# Altium PCB Photo Board Rec.PcbDoc
Units mm, origin at the board's own origin, x right, y up, seen from the top; angles counter-clockwise.
Board outline 38.5 x 9.75 mm, 2 copper layers (Top Layer, Bottom Layer); 4 components, 2 nets, 7 pads, 0 vias.
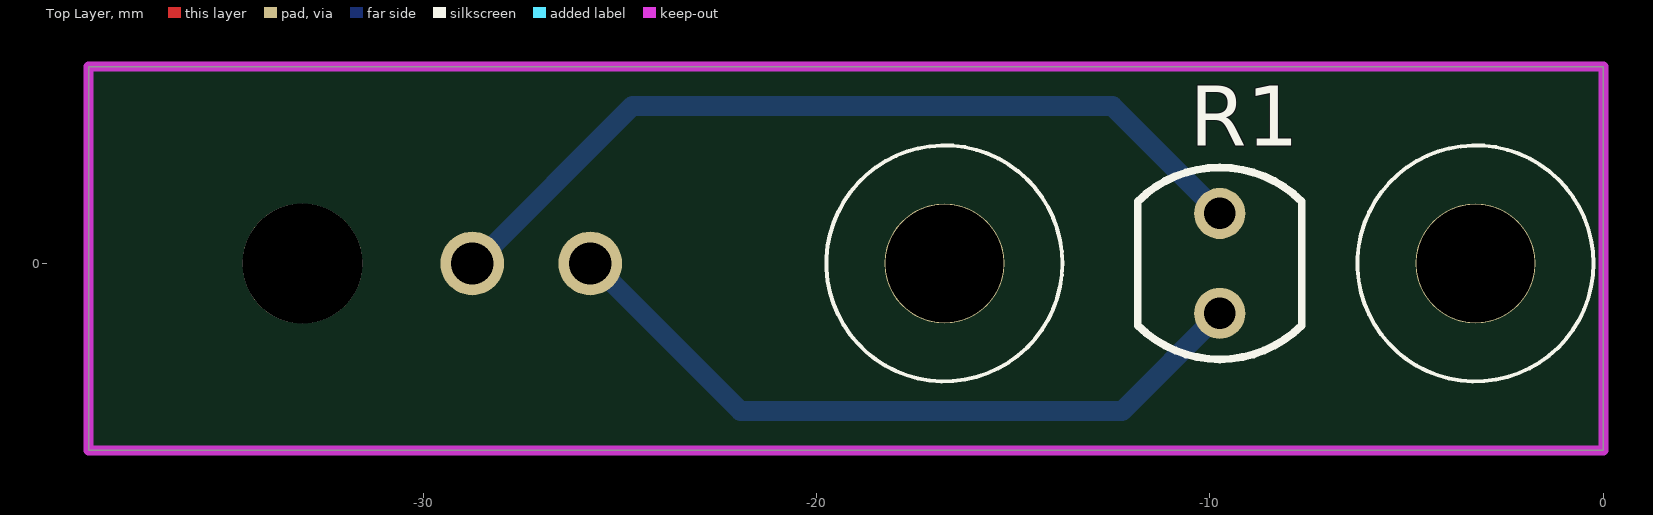
[diagram p0: Top Layer view]
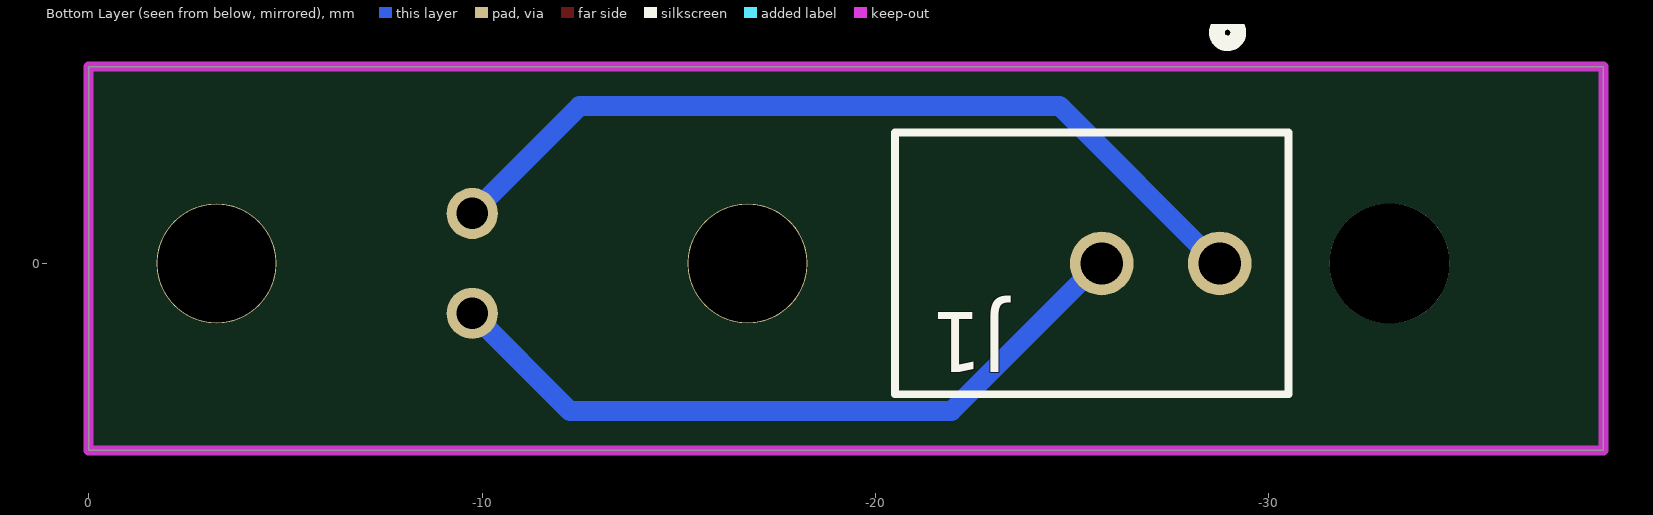
[diagram p1: Bottom Layer view, seen from below]

## Layer stack, top to bottom
Top Solder: solder mask 0.0102, Solder Resist, Dk 3.5
Top Layer: signal copper 0.0356
Dielectric 1: dielectric 0.32, FR-4, Dk 4.8
Bottom Layer: signal copper 0.0356
Bottom Solder: solder mask 0.0102, Solder Resist, Dk 3.5

## Board outline
-38.5,5 -38.5,-4.75 0,-4.75 0,5

## Design rules (kind name [scope] priority, off if disabled: settings)
Clearance [All] p1: gap=0.254 ignorepadtopadclearanceinfootprint=FALSE except(0: Arc-Hole Track-Hole SMDPad-Hole THPad-Hole Via-Hole Fill-Hole Poly-Hole Region-Hole Text-Hole)
HoleSize [All] p1: absolutevalues=TRUE maxlimit=3.1 minlimit=0.025 maxpercent=80.000 minpercent=20.000
PolygonConnect [All] p1: connectstyle=Relief reliefconductorwidth=0.254 reliefentries=4 polygonreliefangle="90 Angle" airgapwidth=0.254
RoutingVias [All] p1: holewidth=0.711 width=1.27 viastyle="Through Hole" minholewidth=0.711 minwidth=1.27 maxholewidth=0.711 maxwidth=1.27
SolderMaskExpansion [All] p1: expansion=0.102 istentingtop=FALSE
Width [All] p1: maxlimit=0.508 minlimit=0.254 preferedwidth=0.508
29 further rules are at their usual default settings.

## Classes and differential pairs
component class "Photo Board": R1

## Components (designator, comment, footprint, x,y, rotation, side; value= is the part's Value field where it differs from the comment)
J1 "0430450200" 43045-0200 -33.07,0 r90 bottom
MH1 "Mounting Hole" MOUNT-HOLE -3.25,0 r0 top locked
MH2 "Mounting Hole" MOUNT-HOLE -16.75,0 r0 top locked
R1 "VT90N1" EXCE-VT90N1 -9.75,0 r90 top

## Footprints (in the part's own frame and the unit in brackets; to place one, negate y for a bottom-side part, rotate by r counter-clockwise, add the part's x,y. Pads: shape width x height; smd on the part's side, far side on the other; paste and mask are expansions set on the pad)
43045-0200 [mm]
  round 1.62 hole 1.07: 1(0,4.32) 2(0,7.32)
  round 3.05 hole 3.05: 3(0,0)
  silkscreen extent -3.32,2.57 6.14,12.57, body extent -3.57,-4.6 3.58,7.64, height 8.25
EXCE-VT90N1 [mm] "THD, 2-Leads, Body Width 4.17mm (Max), Height 2.29mm"
  round 1.3 hole 0.8: 1(-1.27,0) 2(1.27,0)
  silkscreen extent -2.44,-2.08 2.44,2.08, body extent -2.44,-2.09 2.44,2.09, height 2.29
MOUNT-HOLE [mil] "#4, 0.116in"
  round 120 hole 118 unplated mask+1.97: 0(0,0)
  silkscreen extent -118,-118 118,118

## Part data
J1: "Connector", Manufacturer_Name=Molex, Mouser Part Number=N/A, Arrow Part Number=0430450200, Arrow Price/Stock=https://www.arrow.com/en/products/0430450200/molex, Datasheet Link=http://www.molex.com/webdocs/datasheets/pdf/en-us//0430450200_PCB_HEADERS.pdf, Manufacturer_Part_Number=0430450200, Mouser Price/Stock=https://www.mouser.co.uk/ProductDetail/Molex/0430450200?qs=PBcRNPEHKsq8d1JP3B5UOw%3D%3D
MH1 MH2: "#4 Screw, 0.116in Diameter"
R1: library part CMP-2000-07406-1, "Photoconductive Resistor, 200 kOhm, 100 V, 80 mW, -40 to 75 degC, 2-Pin THD, RoHS", Dark Resistance=200kohm, Manufacturer="Excelitas Technology", Operating Temperature Max=75°C, Operating Temperature Min=-40°C, Package Description="2-Pin Through Hole Device, Body Width 4.17 mm (Max), Height 2.29 mm", Power Rating=80mW, Resistance @ Lux=12kohm, Resistor Case Style=-, Voltage Rating=100V, Datasheet URL=http://datasheet.octopart.com/VT90N1-Excelitas-datasheet-10388451.pdf, Datasheet Version=09/2006, Manufacturer URL=http://www.excelitas.com/Pages/Index.aspx, Mounting Technology=ThroughHole, Package Reference=VT90N1, Packaging=Each, Product Range=-, SVHC=Cadmiumchloride(15-Jun-2015)

## Nets (pads, with @x,y where several pads share a name; then routed paths per layer and width w, separated by ;. In a path a pad name is that pad's centre, name@x,y a point inside that pad or via, vN(x,y) a via of type N, cw(c..) or ccw(c..) an arc to the next point about the centre after c; other vN are vias at no path point)
NetJ1_1: J1.1 R1.2 | length 21.8
  Bottom Layer w0.508: J1.1 -28.68,0 -24.68,4 -12.48,4 R1.2
NetJ1_2: J1.2 R1.1 | length 18.6
  Bottom Layer w0.508: J1.2 -25.68,0 -21.93,-3.75 -12.23,-3.75 R1.1
pads on no net: J1.3 MH1.0 MH2.0

## Keep-outs
Keep-Out Layer:
  lines w0.254: -38.5,-4.75 0,-4.75 0,5 -30.5,5 -38.5,5 -38.5,-4.75